# Altium PCB PCB_Cloud_Controller.PcbDoc
Units mm, origin at the board's own origin, x right, y up, seen from the top; angles counter-clockwise.
Board outline 49.66 x 49.78 mm, 2 copper layers (Top Layer, Bottom Layer); 46 components, 32 nets, 171 pads, 53 vias.
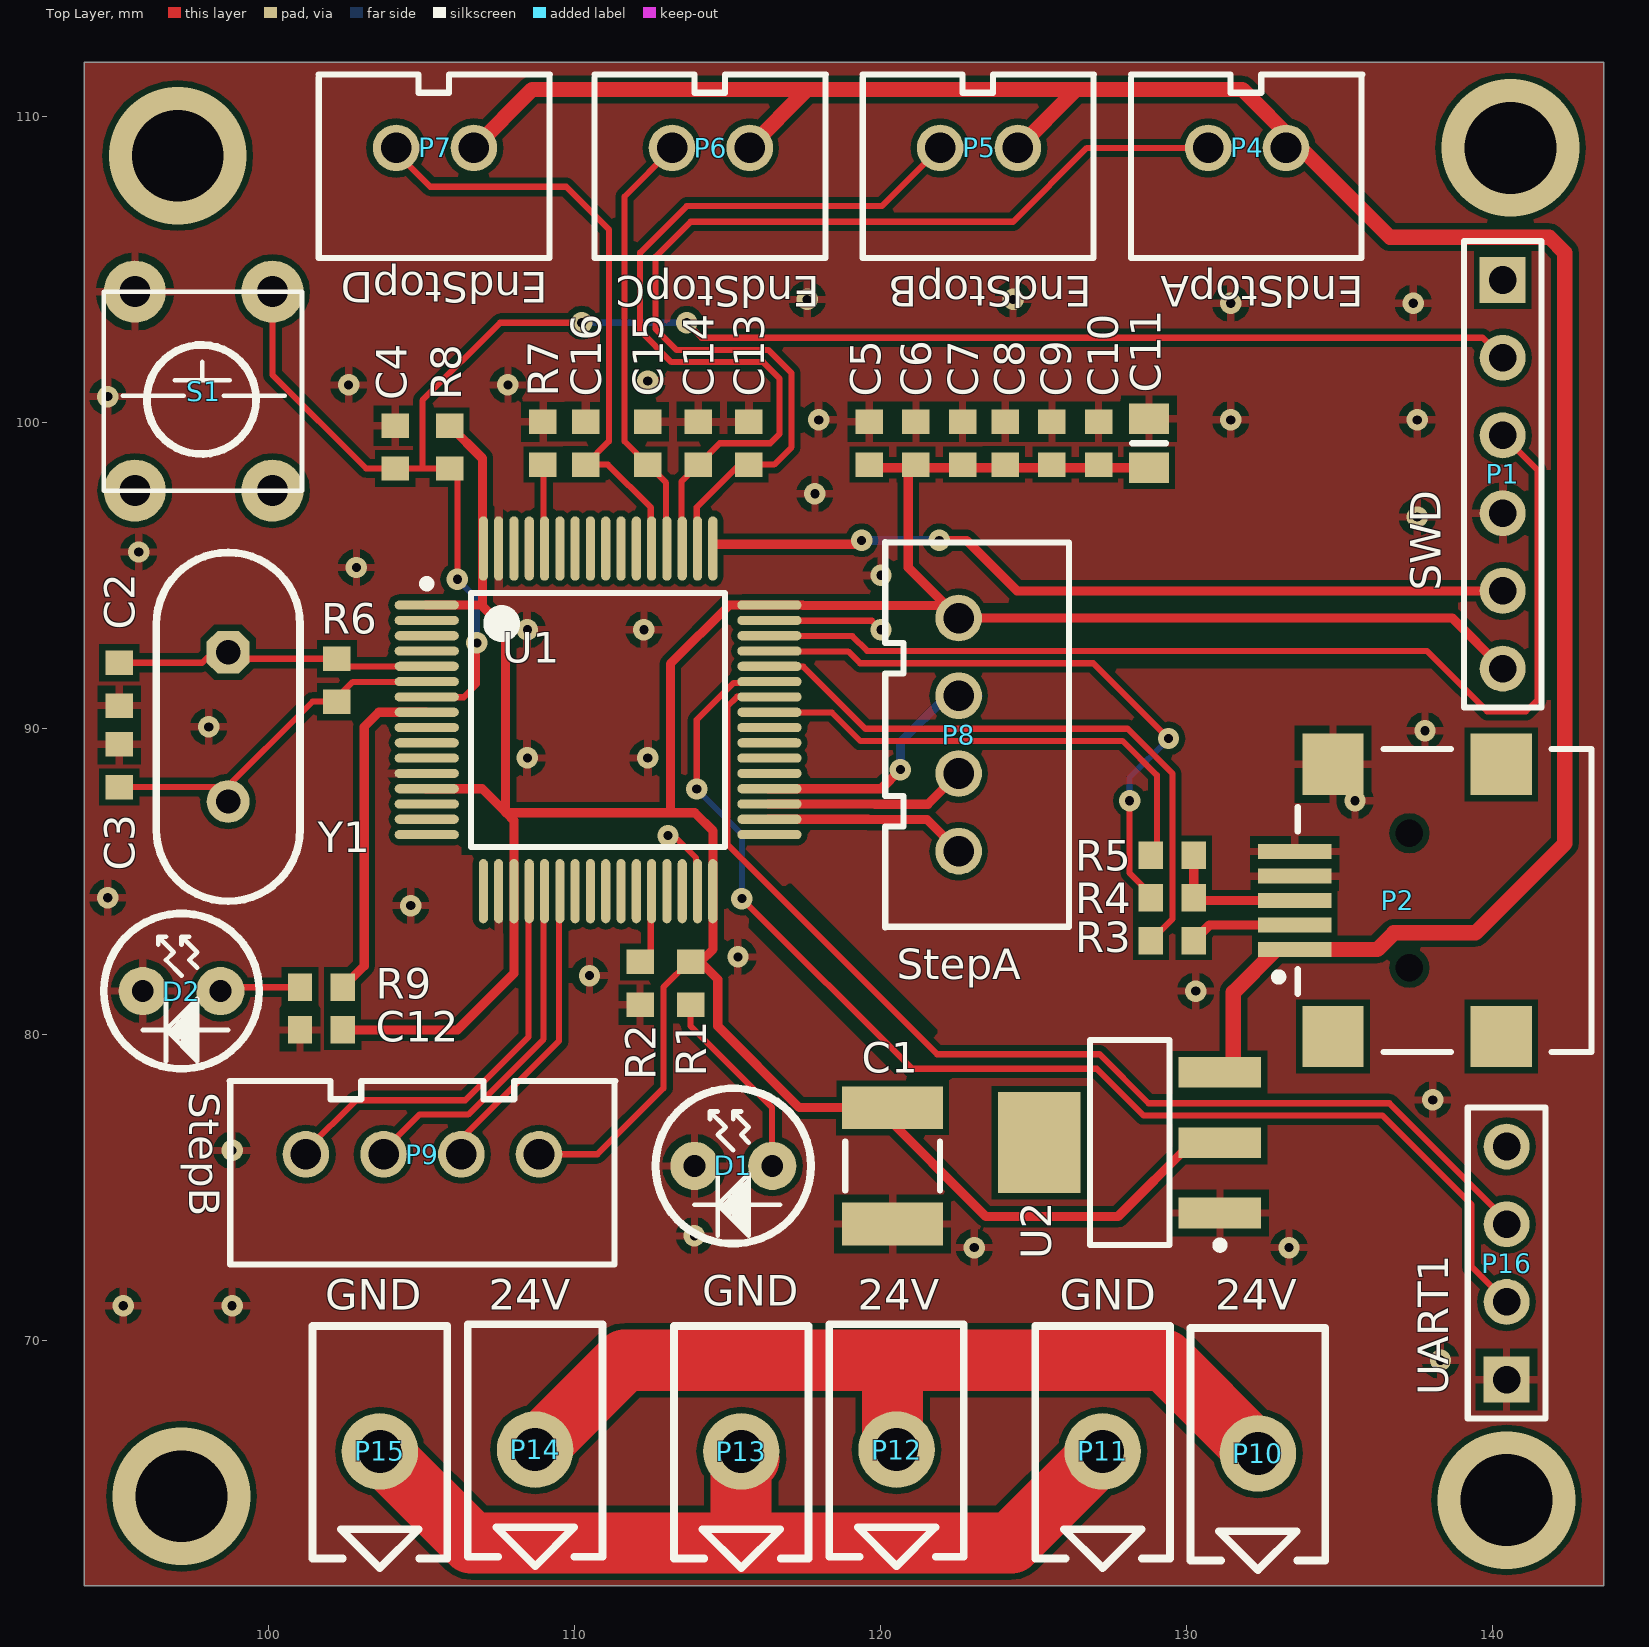
[diagram p0: Top Layer view]
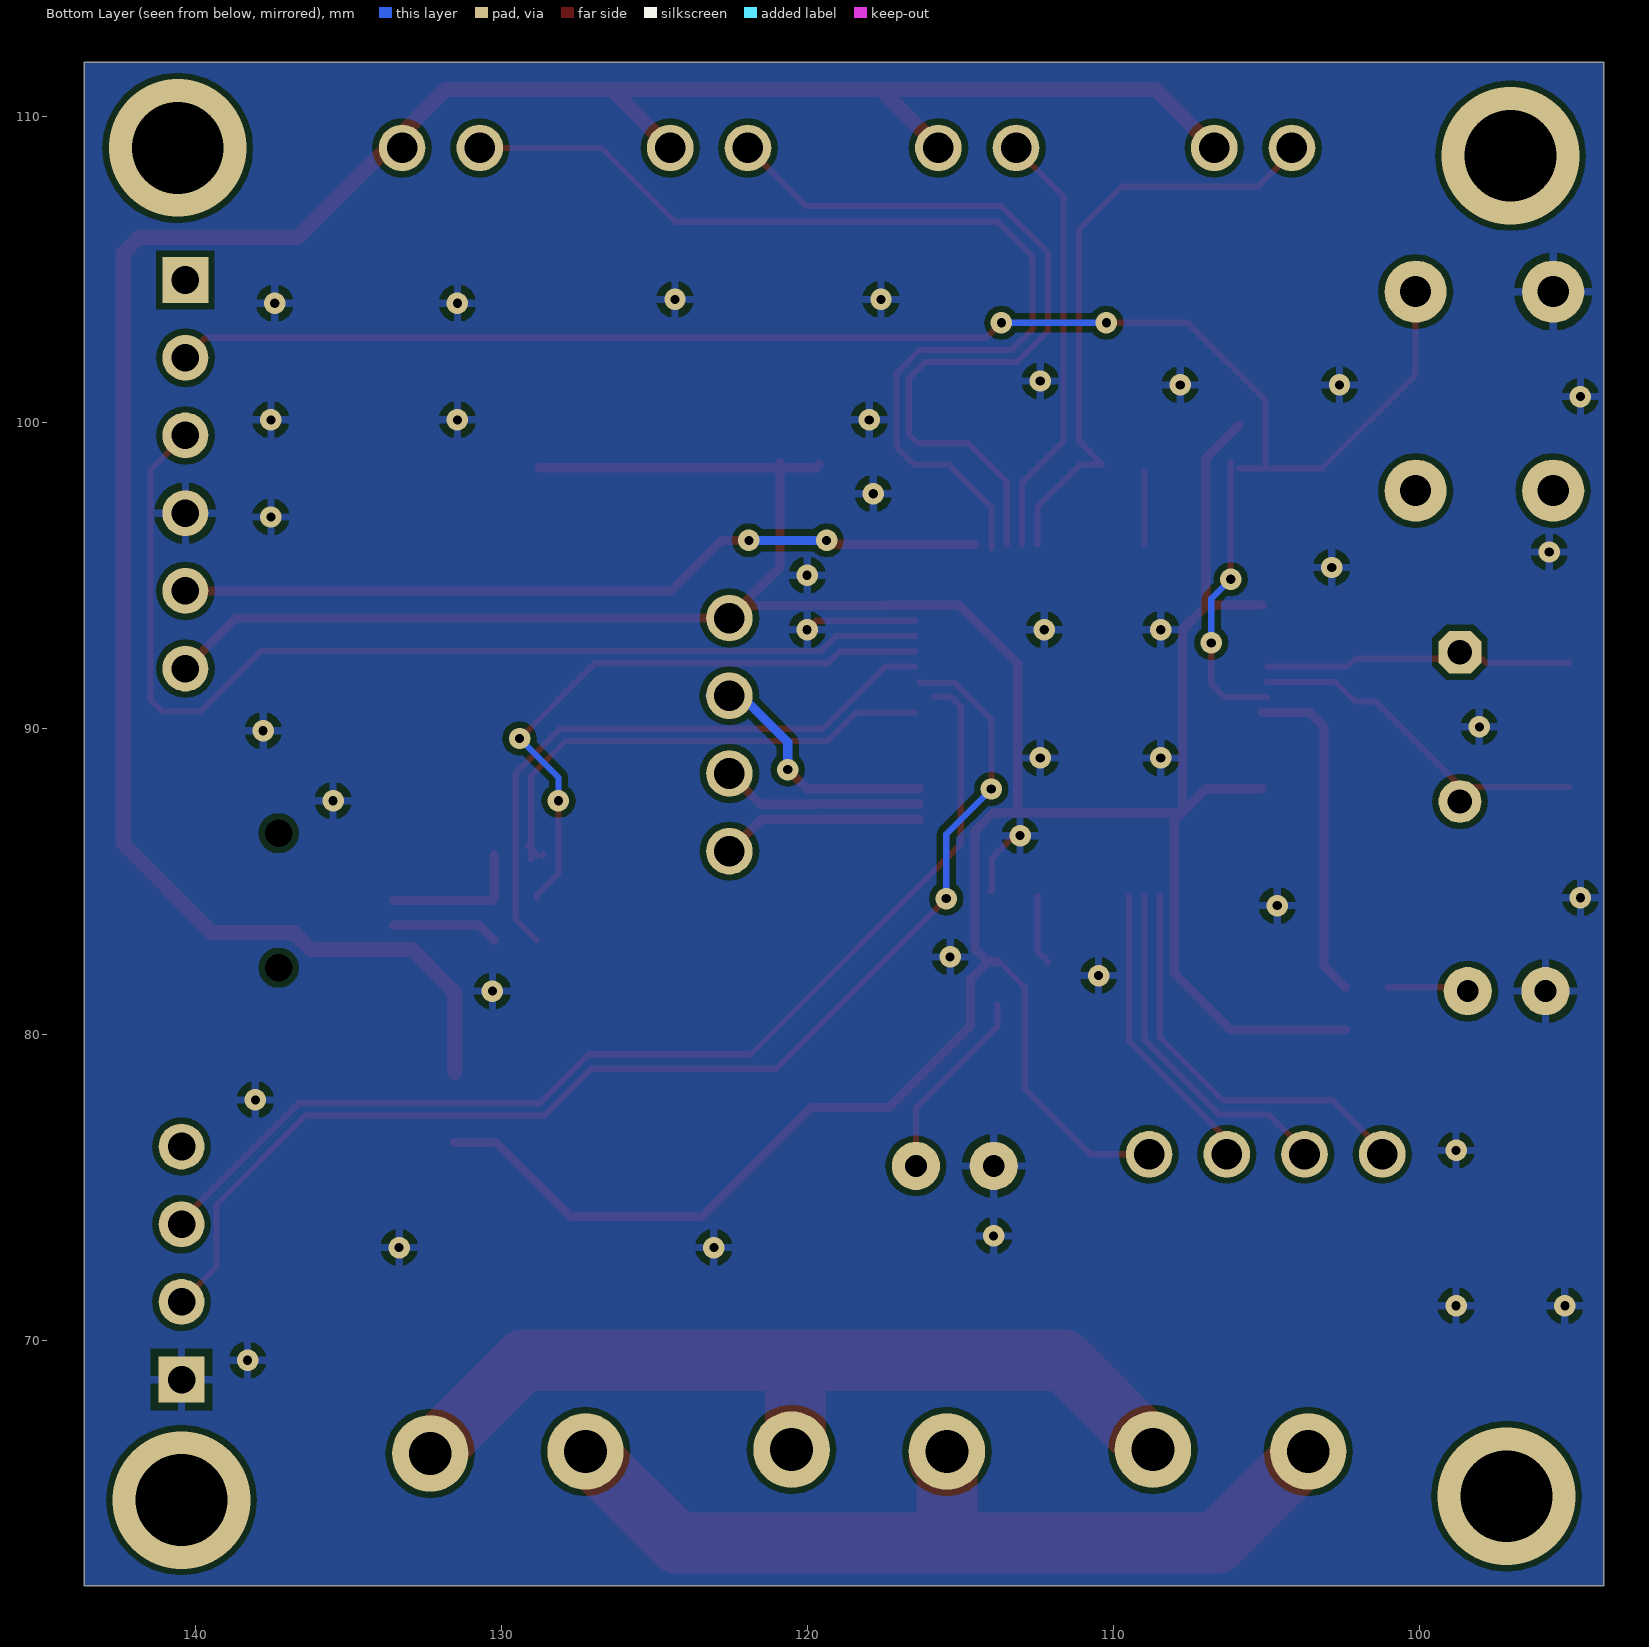
[diagram p1: Bottom Layer view, seen from below]

## Layer stack, top to bottom
Top Solder: solder mask 0.0102, Solder Resist, Dk 3.5
Top Layer: signal copper 0.0356
Dielectric 1: dielectric 0.32, FR-4, Dk 4.8
Bottom Layer: signal copper 0.0356
Bottom Solder: solder mask 0.0102, Solder Resist, Dk 3.5

## Board outline
93.98,61.976 93.98,111.76 143.637,111.76 143.637,61.976

## Design rules (kind name [scope] priority, off if disabled: settings)
Clearance [All] p1: gap=0.2 ignorepadtopadclearanceinfootprint=FALSE
ComponentClearance [All] p1 off: gap=0.254 collisioncheckmode=3 verticalgap=0.254 showdistances=FALSE
PolygonConnect [All] p1: connectstyle=Relief reliefconductorwidth=0.254 reliefentries=4 polygonreliefangle="90 Angle" airgapwidth=0.254
RoomDefinition STM32f103RBT6 [InComponentClass('STM32f103RBT6')] p1 off: confinementstyle=ConfineOut formatcopy=TRUE lockcomponents=FALSE outline 145.796,93.091 156.591,93.091 156.591,111.379 145.796,111.379
RoomDefinition POWER [InComponentClass('POWER')] p2: confinementstyle=ConfineOut formatcopy=TRUE lockcomponents=FALSE outline 145.796,79.756 158.242,79.756 158.242,90.805 145.796,90.805
RoomDefinition interface [InComponentClass('interface')] p3: confinementstyle=ConfineOut formatcopy=TRUE lockcomponents=FALSE outline 156.21,62.103 145.923,62.103 145.923,77.851 156.21,77.851
RoutingVias [All] p1: holewidth=0.711 width=1.27 viastyle="Through Hole" minholewidth=0.711 minwidth=1.27 maxholewidth=0.711 maxwidth=1.27
SolderMaskExpansion [All] p1: expansion=0.102
Width [All] p1: maxlimit=2 minlimit=0.2 preferedwidth=0.254
29 further rules are at their usual default settings.

## Classes and differential pairs
component class STM32f103RBT6: C2 C3 C4 C5 C6 C7 C8 C9 C10 C11 C12 D2 P1 P2 p3 P16 R2 R3 R4 R5 R6 R7 R8 R9 S1 Y1
component class POWER: C1 D1 P10 P11 P12 P13 P14 P15 R1 U2
component class interface: C13 C14 C15 C16 EndStopA EndStopC P4 P5 P6 P7 p8 P9

## Components (designator, comment, footprint, x,y, rotation, side; value= is the part's Value field where it differs from the comment)
C1 "10UF" 1812(4532) 120.396,75.692 r270 top
C2 "22PF" 0603(1608) 95.123,91.44 r90 top
C3 "22PF" 0603(1608) 95.123,88.773 r90 top
C4 "0.1UF" 0603(1608) 104.14,99.187 r270 top
C5 "0.1UF" 0603(1608) 119.634,99.314 r90 top
C6 "0.1UF" 0603(1608) 121.158,99.314 r90 top
C7 "0.1UF" 0603(1608) 122.682,99.314 r90 top
C8 "0.1UF" 0603(1608) 124.079,99.314 r90 top
C9 "0.1UF" 0603(1608) 125.603,99.314 r90 top
C10 "0.1UF" 0603(1608) 127.127,99.314 r90 top
C11 "10UF" 0805(2012) 128.778,99.314 r90 top
C12 "0.1UF" 0603(1608) 101.727,80.137 r0 top
C13 "0.1UF" 0603(1608) 115.697,99.314 r90 top
C14 "0.1UF" 0603(1608) 114.046,99.314 r90 top
C15 "0.1UF" 0603(1608) 112.395,99.314 r90 top
C16 "0.1UF" 0603(1608) 110.363,99.314 r90 top
D1 "LED0" LED 116.459,75.692 r180 top
D2 "LED0" LED 98.425,81.407 r180 top
P1 "SWD" HDR1X6 140.335,104.648 r270 top
P2 "USB" USB/SM0.8-6H5 142.537,84.369 r0 top
P4 "EndStopA" XH2.54_2PIN 131.953,108.966 r180 top
P5 "EndStopB" XH2.54_2PIN 123.19,108.966 r180 top
P6 "EndStopC" XH2.54_2PIN 114.427,108.966 r180 top
P7 "EndStopD" XH2.54_2PIN 105.41,108.966 r180 top
P8 "StepA" XH2.54_4PIN 122.555,89.789 r270 top
P9 "StepB" XH2.54_4PIN 105.029,76.073 r180 top
P10 "24V" KF508 132.334,66.294 r0 top
P11 "GND" KF508 127.259,66.36 r0 top
P12 "24V" KF508 120.523,66.421 r0 top
P13 "GND" KF508 115.448,66.36 r0 top
P14 "24V" KF508 108.712,66.421 r0 top
P15 "GND" KF508 103.637,66.36 r0 top
P16 "UART1" HDR1X4 140.462,68.707 r90 top
R1 "1K" 0603(1608) 113.792,81.661 r270 top
R2 "10K" 0603(1608) 112.141,81.661 r270 top
R3 "0" 0603(1608) 129.54,83.058 r180 top value=27
R4 "0" 0603(1608) 129.54,84.455 r180 top value=27
R5 "1K" 0603(1608) 129.537,85.847 r180 top value=1K5
R6 "1M" 0603(1608) 102.235,91.567 r270 top
R7 "10K" 0603(1608) 108.966,99.314 r270 top
R8 "10K" 0603(1608) 105.918,99.187 r270 top
R9 "330R" 0603(1608) 101.727,81.534 r0 top
S1 "Reset" SW-6 95.631,104.267 r270 top
U1 "STM32F103RBT6" LQFP64_M 110.769,90.272 r0 top
U2 "AMS1117" SOT223-4M 128.143,76.454 r180 top
Y1 "8M" BCY-W2/E4.7 98.679,90.043 r270 top

## Footprints (in the part's own frame and the unit in brackets; to place one, negate y for a bottom-side part, rotate by r counter-clockwise, add the part's x,y. Pads: shape width x height; smd on the part's side, far side on the other; paste and mask are expansions set on the pad)
0603(1608) [mm] "Chip Capacitor, Body 1.6x0.8mm, IPC High Density"
  rect 0.8x0.9 smd: 1(-0.7,0) 2(0.7,0)
  body extent -0.87,-0.48 0.87,0.48, height 1.3
0805(2012) [mm] "Chip Resistor, Body 2.0x1.2mm, IPC High Density"
  rect 1x1.3 smd: 1(-0.8,0) 2(0.8,0)
  silkscreen extent 0,-0.55 0,0.55, body extent -1.07,-0.7 1.07,0.7, height 0.7
1812(4532) [mm] "Chip Capacitor, Body 4.5x3.2mm, IPC High Density"
  rect 1.4x3.3 smd: 1(-1.9,0) 2(1.9,0)
  silkscreen extent -0.8,-1.55 0.8,1.55, body extent -2.4,-1.7 2.4,1.7, height 1.4
BCY-W2/E4.7 [mm] "Quartz Crystal, Thru-Hole; 2 Leads; Body 11.35 x 4.65 x 13.46 mm (LxWxH max)"
  oct 1.4x1.4 hole 0.8: 1(-2.44,0)
  round 1.4 hole 0.8: 2(2.44,0)
  silkscreen extent -5.7,-2.35 5.7,2.35, body extent -5.7,-2.4 5.7,2.4, height 3
HDR1X4 [mm] "Connector; Header; 4 Position"
  rect 1.5x1.5 hole 0.9: 1(0,0)
  round 1.5 hole 0.9: 2(2.54,0) 3(5.08,0) 4(7.62,0)
  silkscreen extent -1.27,-1.27 8.89,1.27
HDR1X6 [mm] "Connector; Header; 6 Position"
  rect 1.5x1.5 hole 0.9: 1(0,0)
  round 1.5 hole 0.9: 2(2.54,0) 3(5.08,0) 4(7.62,0) 5(10.16,0) 6(12.7,0)
  silkscreen extent -1.27,-1.27 13.97,1.27
KF508 [mm]
  round 2.5 hole 1.4: 1(0,0)
  silkscreen extent -2.2,-3.81 2.2,4.1, body extent -2.2,-3.5 2.2,4.1, height 10
LED [mil]
  round 62 hole 28: 1(0,0) 2(100,0)
  silkscreen extent -50,-100 150,100
LQFP64_M [mm]
  oval 2.1x0.3 smd: 1(-5.6,3.75) 2(-5.6,3.25) 3(-5.6,2.75) 4(-5.6,2.25) 5(-5.6,1.75) 6(-5.6,1.25) 7(-5.6,0.75) 8(-5.6,0.25) 9(-5.6,-0.25) 10(-5.6,-0.75) 11(-5.6,-1.25) 12(-5.6,-1.75) 13(-5.6,-2.25) 14(-5.6,-2.75) 15(-5.6,-3.25) 16(-5.6,-3.75) 33(5.6,-3.75) 34(5.6,-3.25) 35(5.6,-2.75) 36(5.6,-2.25) 37(5.6,-1.75) 38(5.6,-1.25) 39(5.6,-0.75) 40(5.6,-0.25) 41(5.6,0.25) 42(5.6,0.75) 43(5.6,1.25) 44(5.6,1.75) 45(5.6,2.25) 46(5.6,2.75) 47(5.6,3.25) 48(5.6,3.75)
  oval 0.3x2.1 smd: 17(-3.75,-5.6) 18(-3.25,-5.6) 19(-2.75,-5.6) 20(-2.25,-5.6) 21(-1.75,-5.6) 22(-1.25,-5.6) 23(-0.75,-5.6) 24(-0.25,-5.6) 25(0.25,-5.6) 26(0.75,-5.6) 27(1.25,-5.6) 28(1.75,-5.6) 29(2.25,-5.6) 30(2.75,-5.6) 31(3.25,-5.6) 32(3.75,-5.6) 49(3.75,5.6) 50(3.25,5.6) 51(2.75,5.6) 52(2.25,5.6) 53(1.75,5.6) 54(1.25,5.6) 55(0.75,5.6) 56(0.25,5.6) 57(-0.25,5.6) 58(-0.75,5.6) 59(-1.25,5.6) 60(-1.75,5.6) 61(-2.25,5.6) 62(-2.75,5.6) 63(-3.25,5.6) 64(-3.75,5.6)
  silkscreen extent -5.72,-4.15 4.15,4.57
SOT223-4M [mm] "SOT223, 4-Leads, Body 6.5x3.5mm, Pitch 2.3mm, Lead Span 7mm, IPC Low Density"
  rect 2.7x1 smd: 1(-2.95,2.3) 2(-2.95,0) 3(-2.95,-2.3)
  rect 2.7x3.3 smd: 4(2.95,0)
  silkscreen extent -3.08,-3.35 1.3,3.47, body extent -1.85,-3.35 1.85,3.35, height 1.7
SW-6 [mil]
  round 80 hole 40: 1(0,0) 2(0,177) 3(256,0) 4(256,177)
  silkscreen extent 0,-40 256,215, body extent 0,-39 256,217, height 236
USB/SM0.8-6H5 [mm] "Connector; USB2.0, Type B, SM; 5 Position; Right Angle"
  rect 2.4x0.5 smd paste-2.4: 1(-9,-1.6) 2(-9,-0.8) 3(-9,0) 4(-9,0.8) 5(-9,1.6)
  rect 2x2 smd paste-2.6: 6(-7.75,4.45) 7(-2.25,4.45) 8(-7.75,-4.45) 9(-2.25,-4.45)
  round 0.6 hole 0.9 unplated: MH1(-5.25,2.2) MH2(-5.25,-2.2)
  silkscreen extent -9.65,-4.95 0.7,4.95, body extent -8.9,-4.95 0.7,4.95, height 3.9
XH2.54_2PIN [mm]
  round 1.524 hole 1: 1(-1.3,0) 2(1.24,0)
  silkscreen extent -3.79,-2.4 3.77,3.6
XH2.54_4PIN [mil]
  round 60 hole 39.37: 1(-150,0) 2(-50,0) 3(50,0) 4(150,0)
  silkscreen extent -248,-94 248,142

## Part data
C1: library part "Cap Pol3", "Polarized Capacitor (Surface Mount)", LatestRevisionDate=29-May-2009, LatestRevisionNote="IPC-7351 Footprint Added.", PackageDescription="Chip Capacitor", PackageReference=C0805, Published=8-Jun-2000, Publisher="Altium Limited"
C2 C3 C4 C12: library part CAP, "Capacitor"
C5 C6 C7 C8 C9 C10 C11 C13 C14 C15 C16: library part Cap, "Capacitor", LatestRevisionDate=17-Jul-2002, LatestRevisionNote="Re-released for DXP Platform.", PackageReference=RAD-0.3, Published=8-Jun-2000, Publisher="Altium Limited"
D1 D2: "Typical INFRARED GaAs LED", LatestRevisionDate=08-Jul-2005, LatestRevisionNote="Mech Layer 1 removed.", PackageDescription="LED; 2 Leads", PackageReference=LED-0, Published=8-Jun-2000, Publisher="Altium Limited"
P1: library part "Header 6", "Header, 6-Pin", LatestRevisionDate=17-Jul-2002, LatestRevisionNote="Re-released for DXP Platform.", Publisher="Altium Limited"
P2: library part "Con Usb"
P4 P5 P6 P7: library part "Header 2", "Header, 2-Pin", LatestRevisionDate=17-Jul-2002, LatestRevisionNote="Re-released for DXP Platform.", Publisher="Altium Limited"
P8 P9 P16: library part "Header 4", "Header, 4-Pin", LatestRevisionDate=17-Jul-2002, LatestRevisionNote="Re-released for DXP Platform.", Publisher="Altium Limited"
P10 P11 P12 P13 P14 P15: library part KF508, "Power Socket 20A"
R1 R3 R4 R5: library part "Res Semi", "Semiconductor Resistor", LatestRevisionDate=17-Jul-2002, LatestRevisionNote="Re-released for DXP Platform.", PackageReference=AXIAL-0.5, Published=8-Jun-2000, Publisher="Altium Limited"
R2 R6 R7 R8: library part Res2, "Resistor"
R9: library part RES
S1: library part SW-PB, "Switch", LatestRevisionDate=17-Jul-2002, LatestRevisionNote="Re-released for DXP Platform.", PackageDescription="Switch; 2 Leads", PackageReference=SPST-2, Published=24-Mar-1999, Publisher="Altium Limited"
U2: "DC-DC Convertor 3.3V"
Y1: library part CRYSTAL, "Crystal"

## Via types
v1: diameter 0.7, hole 0.3, Top Layer to Bottom Layer, 49 vias
v2: diameter 4.5, hole 3, Top Layer to Bottom Layer, 4 vias

## Nets (pads, with @x,y where several pads share a name; then routed paths per layer and width w, separated by ;. In a path a pad name is that pad's centre, name@x,y a point inside that pad or via, vN(x,y) a via of type N, cw(c..) or ccw(c..) an arc to the next point about the centre after c; other vN are vias at no path point)
3.3V: C1.1 C5.1 C6.1 C7.1 C8.1 C9.1 C10.1 C11.1 C12.2 P1.6 P8.1 P9.1 R1.1 R8.1 U1.1 U1.13 U1.19 U1.32 U1.48 U1.64 U2.2 | length 122.4
  Top Layer w0.2: P9.1@109.347,76.073 110.744,76.073 112.903,78.232 112.903,81.534 R1.1@113.792,82.423
  Top Layer w0.3: C12.2 106.172,80.137 108.019,81.984 U1.19 108.019,86.982 107.764,87.238 ; U1.13@105.144,88.022 U1.13 106.98,88.022 107.747,87.255 ; U1.1@105.144,94.022 106.948,94.022 106.99,93.98 ; R8.1 106.99,98.815 106.99,96.012 106.99,93.98 ; P9.1@108.839,75.565 P9.1@109.347,76.073 ; R1.1 R1.1@114.108,82.361 ; R1.1@114.046,82.423 R1.1@114.108,82.361 ; C5.1 119.734,98.514 C6.1@120.904,98.514 ; C6.1@120.904,98.679 C6.1@120.904,98.514 ; C11.1 C6.1@120.904,98.514 ; U2.2@131.533,76.454 U2.2 130.175,76.454 127.762,74.041 123.444,74.041 119.888,77.597 117.348,77.597 114.681,80.264 114.681,81.788 R1.1@114.108,82.361 ; P1.6 138.684,93.599 P8.1 P8.1@122.142,94.012 ; 106.99,93.98 107.747,93.223 107.747,87.255 ; 107.747,87.255 107.764,87.238 ; 107.764,87.238 113.132,87.238 ; 113.132,87.238 113.93,87.238 114.529,86.639 114.529,82.779 114.111,82.361 R1.1@114.108,82.361 ; 113.132,87.238 113.132,92.1 115.053,94.022 117.451,94.022 117.461,94.012 P8.1@122.142,94.012 ; C6.1@120.904,98.514 120.904,95.25 P8.1@122.142,94.012
5V: P2.1 P4.1 P5.1 P6.1 P7.1 U2.3 | length 79.1
  Top Layer w0.5: P7.1 108.615,110.871 117.602,110.871 ; P6.1 115.727,108.996 117.602,110.871 ; P5.1 126.365,110.841 126.365,110.871 ; U2.3@131.533,78.754 131.533,81.368 132.934,82.769 P2.1 136.236,82.769 136.779,83.312 139.446,83.312 142.367,86.233 142.367,105.537 141.859,106.045 136.652,106.045 P4.1@133.604,109.093 ; P4.1@133.253,109.093 P4.1@133.604,109.093 ; 117.602,110.871 126.365,110.871 ; 126.365,110.871 131.826,110.871 P4.1@133.604,109.093
24V: P10.1 P12.1 P14.1 | length 28.8
  Top Layer w2: P14.1 111.633,69.342 120.396,69.342 ; P12.1@120.396,66.675 120.396,69.342 ; P10.1 129.286,69.342 120.396,69.342
-24v: P11.1 P13.1 P15.1 | length 28.9
  Top Layer w2: P15.1 106.624,63.373 115.443,63.373 ; P13.1@115.702,66.106 115.443,65.847 115.443,63.373 ; P11.1 124.272,63.373 115.443,63.373
DEBUG-RXD1: P16.2 U1.43 | length 41
  Top Layer w0.2: v1(113.995,88.011) 113.995,90.275 115.192,91.472 116.294,91.472 U1.43@116.344,91.522 ; v1(115.468,84.43) 121.031,78.867 127.069,78.867 128.593,77.343 136.398,77.343 139.319,74.422 139.319,72.39 P16.2
  Bottom Layer w0.2: v1(113.995,88.011) 115.468,86.538 v1(115.468,84.43)
DEBUG-TXD1: P16.3 U1.42 | length 36.3
  Top Layer w0.2: U1.42@115.875,91.034 115.32,91.034 114.994,90.708 114.994,86.199 121.85,79.343 127.159,79.343 128.759,77.743 136.633,77.743 P16.3@140.589,73.787
DRV1_CLK: P8.4 U1.34 | length 6.6
  Top Layer w0.3: U1.34@116.344,87.022 119.592,87.022 119.602,87.012 121.522,87.012 P8.4
DRV1_DIR: P8.3 U1.35 | length 6.6
  Top Layer w0.3: U1.35@116.344,87.522 119.799,87.522 119.809,87.512 121.548,87.512 P8.3
DRV1_EN: P8.2 U1.36 | length 8.6
  Top Layer w0.3: U1.36@116.344,88.022 120.006,88.022 120.016,88.012 v1(120.65,88.646)
  Bottom Layer w0.3: v1(120.65,88.646) 120.65,89.535 122.174,91.059 P8.2@123.19,91.059
DRV2_CLK: P9.4 U1.20 | length 14.2
  Top Layer w0.2: P9.4@101.219,75.438 101.219,76.2 102.86,77.841 106.426,77.841 108.49,79.905 U1.20@108.49,84.512
DRV2_DIR: P9.3 U1.21 | length 12.2
  Top Layer w0.2: P9.3@103.759,75.438 103.759,76.2 104.932,77.373 106.523,77.373 108.99,79.839 U1.21@108.99,84.512
DRV2_EN: P9.2 U1.22 | length 10.4
  Top Layer w0.2: P9.2@106.299,75.438 106.299,76.582 109.49,79.773 U1.22@109.49,84.512
ENDS_A: C13.1 P4.2 U1.50 | length 34.6
  Top Layer w0.2: U1.50@113.994,95.872 113.994,97.22 115.388,98.614 C13.1 116.521,98.614 117.094,99.187 117.094,101.6 116.332,102.362 113.33,102.362 112.649,103.043 112.649,105.41 113.792,106.553 124.333,106.553 126.746,108.966 P4.2
ENDS_B: C14.1 P5.2 U1.51 | length 26.7
  Top Layer w0.2: U1.51@113.49,96.012 113.49,98.058 C14.1 114.746,99.314 116.395,99.314 116.694,99.613 116.694,101.434 116.166,101.962 113.164,101.962 112.141,102.985 112.141,105.537 113.665,107.061 120.045,107.061 P5.2
ENDS_C: C15.1 P6.2 U1.52 | length 14.1
  Top Layer w0.2: U1.52@112.99,96.012 112.99,98.019 C15.1 111.633,99.376 111.633,107.373 P6.2@113.207,108.946
ENDS_D: C16.1 P7.2 U1.53 | length 20.3
  Top Layer w0.2: P7.2@103.886,109.093 105.283,107.696 109.728,107.696 111.125,106.299 111.125,99.376 C16.1 111.092,98.614 112.49,97.216 U1.53@112.49,96.012
GND: C1.2 C2.1 C3.2 C4.1 C5.2 C6.2 C7.2 C8.2 C9.2 C10.2 C11.2 C12.1 C13.2 C14.2 C15.2 C16.2 D1.2 D2.2 P1.4 P2.4 P2.5 P2.6 P16.1 R2.2 R7.1 S1.1 U1.12 U1.18 U1.31 U1.47 U1.63 U2.1 | length 6
  Top Layer w0.2: v1(113.055,86.487) 113.24,86.487 113.969,85.758 113.969,84.672 U1.31 ; U1.47@116.49,93.512 119.721,93.512 v1(120.015,93.218)
  other v1: 138.303,69.342 95.25,71.12 98.806,71.12 123.063,73.025 133.35,73.025 113.919,73.406 98.806,76.2 138.049,77.851 130.302,81.407 110.49,81.915 115.341,82.525 104.648,84.201 94.742,84.455 135.509,87.63 108.458,89.027 112.395,89.027 137.795,89.916 98.044,90.043 108.458,93.218 112.268,93.218 120.015,94.996 102.87,95.25 95.758,95.758 137.541,96.901 117.856,97.663 117.983,100.076 131.445,100.076 137.541,100.076 94.742,100.838 102.616,101.219 107.823,101.219 112.395,101.346 131.445,103.886 137.414,103.886 117.602,104.013 124.333,104.013
NetD1_1: D1.1 R1.2 | length 6.8
  Top Layer w0.2: R1.2 113.792,80.264 116.459,77.597 116.459,76.073 116.84,75.692 D1.1@116.84,76.008
NetD2_1: D2.1 R9.1 | length 2.9
  Top Layer w0.2: D2.1@98.425,80.772 99.187,81.534 R9.1
NetP2_2: P2.2 R3.1 | length 3.5
  Top Layer w0.3: R3.1 130.751,83.569 P2.2
NetP2_3: P2.3 R4.1 R5.1 | length 4.7
  Top Layer w0.3: R5.1 130.24,85.844 R4.1 130.326,84.369 P2.3
NetR2_1: R2.1 U1.28 | length 2.3
  Top Layer w0.2: R2.1 112.49,82.71 U1.28@112.49,84.512
NetR7_2: R7.2 U1.60 | length 2.4
  Top Layer w0.2: U1.60@108.99,96.012 R7.2@108.99,98.384
OSC_IN: C2.2 R6.1 U1.5 Y1.1 | length 10.2
  Top Layer w0.2: C2.2 97.828,92.14 98.171,92.483 98.387,92.267 102.108,92.267 102.363,92.012 U1.5@104.99,92.012
OSC_OUT: C3.1 R6.2 U1.6 Y1.2 | length 11.5
  Top Layer w0.2: C3.1 98.209,88.073 98.425,87.857 101.435,90.867 102.108,90.867 102.753,91.512 U1.6@104.99,91.512
RESET: C4.2 P1.2 R8.2 S1.2 U1.7 | length 58.3
  Top Layer w0.2: S1.2 100.127,101.549 103.189,98.487 C4.2 105.029,98.487 ; U1.7@104.99,91.012 106.379,91.012 106.807,91.44 v1(106.807,92.786) ; R8.2 105.029,98.487 ; v1(106.172,94.869) R8.2@106.172,98.679 ; v1(110.236,103.251) 107.569,103.251 105.029,100.711 105.029,98.487 ; v1(113.665,103.251) 114.154,102.762 139.681,102.762 P1.2
  Bottom Layer w0.2: v1(106.172,94.869) 106.807,94.234 v1(106.807,92.786) ; v1(110.236,103.251) v1(113.665,103.251)
RUN: R9.2 U1.8 | length 11
  Top Layer w0.3: R9.2 103.124,82.231 103.124,90.043 103.603,90.522 U1.8@105.144,90.522
SWCLK: P1.5 U1.49 | length 26.5
  Top Layer w0.3: U1.49@114.529,96.012 119.253,96.012 v1(119.38,96.139) ; v1(121.92,96.139) 122.809,96.139 124.46,94.488 P1.5
  Bottom Layer w0.3: v1(119.38,96.139) v1(121.92,96.139)
SWDIO: P1.3 U1.46 | length 35.3
  Top Layer w0.2: U1.46@116.49,93.012 119.078,93.012 119.566,92.524 137.854,92.524 139.827,90.551 141.097,90.551 141.478,90.932 141.478,98.425 P1.3
USB+: R4.2 U1.45 | length 20.1
  Top Layer w0.2: U1.45@116.49,92.512 118.943,92.512 119.334,92.121 126.954,92.121 v1(129.413,89.662) ; v1(128.143,87.63) 128.137,87.624 128.137,85.273 128.84,84.57 R4.2
  Bottom Layer w0.2: v1(128.143,87.63) 128.143,88.392 v1(129.413,89.662)
USB-: R3.2 U1.44 | length 20.2
  Top Layer w0.2: U1.44@116.49,92.012 117.476,92.012 119.507,89.981 128.078,89.981 129.537,88.522 129.537,85.273 129.537,85.032 129.54,85.029 129.54,83.758 R3.2
USB_EN: R5.2 U1.41 | length 16.6
  Top Layer w0.2: U1.41@116.49,90.512 118.411,90.512 119.342,89.581 127.912,89.581 129.032,88.461 R5.2@129.032,86.042 ; R5.2@128.636,85.862 R5.2@128.651,85.847 ; R5.2 R5.2@129.032,86.042 ; R5.2@129.032,85.725 R5.2@129.032,86.042 ; R5.2@129.137,86.147 R5.2@129.032,86.042
pads on no net: P1.1 P2.7 P2.8 P2.9 P2.MH1 P2.MH2 P16.4 S1.3 S1.4 U1.2 U1.3 U1.4 U1.9 U1.10 U1.11 U1.14 U1.15 U1.16 U1.17 U1.23 U1.24 U1.25 U1.26 U1.27 U1.29 U1.30 U1.33 U1.37 U1.38 U1.39 U1.40 U1.54 U1.55 U1.56 U1.57 U1.58 U1.59 U1.61 U1.62 U2.4
copper on no net:
  other v2: 140.462,64.77 97.155,64.897 97.028,108.712 140.589,108.966

## Polygon pours and split planes (outlines as drawn)
GND on Top Layer "Top Layer" (solid, pour order 22): 93.98,61.976 93.98,111.76 143.637,111.76 143.637,61.976
GND on Bottom Layer "b Layer" (solid, pour order 23): 93.98,61.976 93.98,111.76 143.637,111.76 143.637,61.976

## Other copper
Top Layer:
  pour cut-out: 115.702,83.444 cw(c115.773,83.515) 115.676,83.541 cw(c115.773,83.566) 115.702,83.637 116.972,84.907 cw(c117.043,84.836) 117.114,84.907 121.839,80.183 cw(c121.768,80.112) 121.868,80.112 cw(c121.768,80.112) 121.865,80.086 cw(c121.768,80.061) 121.868,80.061 cw(c121.768,80.061) 121.839,79.99 120.569,78.72 cw(c120.498,78.791) 120.427,78.72
  pour cut-out: 106.299,85.852 106.299,92.329 107.188,92.329 107.188,86.868 112.141,86.868 112.141,85.852
  pour cut-out: 123.507,91.948 123.507,94.107 138.874,94.107 138.874,91.948

## Silkscreen, mask and mechanical layers (free items; w line width, h text height)
Mechanical 1:
  lines w0.6: 93.853,61.976 143.637,61.976 143.637,111.887 93.853,111.887 93.853,61.976

## Text inside footprints (layer, text, board x,y; h text height)
P2: Mechanical 1 "PCB Edge" at 142.969,80.333 h0.25 r90